# EAGLE board OR, AND, NOT - GATES (EAGLE 9.7.0)

Size 120.42 x 69.28 mm. Coordinates in mm from the lower left corner, seen from the top.
Outline: 0,0 120.42,0 120.42,69.28 0,69.28 0,0
Copper layers (1*16): Top 0.035mm / dielectric 1.5mm / Bottom 0.035mm
Design rules "default": minimum track width 6mil, minimum drill 0.35mm, track to track 6mil, track to pad 6mil, pad to pad 6mil, via to via 6mil, smd to smd 6mil, copper to edge 40mil, drill to drill 6mil, minimum pad ring 10mil, minimum via ring 8mil, stop-mask expansion 4mil, vias tented up to drill 0mil, thermal gap 10mil

## Footprints (pad centres in the part's own frame; a part is rotated, then mirrored left to right if it is on the bottom)
BAT_3002 = smd 3.96 x 3.96: N 0,0.65 | smd 5.08 x 5.08: P 12.825,0.65; P1 -12.825,0.65
LEDRD254W60D565H860B = drill 0.981 pad 1.581: 1 -1.27,0; 2 1.27,0
SWITCH-SPDT-PTH-8.5X3.7MM = drill 1.016 pad 1.88: 1 -2.54,0; 2 0,0; 3 2.54,0
DIP762W53P254L1969H508Q14B = drill 0.743 pad 1.343: 1 -3.81,7.62; 2 -3.81,5.08; 3 -3.81,2.54; 4 -3.81,0; 5 -3.81,-2.54; 6 -3.81,-5.08; 7 -3.81,-7.62; 8 3.81,-7.62; 9 3.81,-5.08; 10 3.81,-2.54; 11 3.81,0; 12 3.81,2.54; 13 3.81,5.08; 14 3.81,7.62

## Placement (x,y rotation side)
BAT2  BR2016  [BAT_3002]  104.99,20.19 90 top
D1  RED  [LEDRD254W60D565H860B]  67,16.95 0 top
SA_-_POWER  TOGGLE  [SWITCH-SPDT-PTH-8.5X3.7MM]  14.28,62.3 0 top
SB_-_POWER  TOGGLE  [SWITCH-SPDT-PTH-8.5X3.7MM]  30.53,57.84 0 top
U1  74HC04_PDIP  [DIP762W53P254L1969H508Q14B]  14.93,23.3 90 top
U2  74HC08_PDIP  [DIP762W53P254L1969H508Q14B]  35.24,23.3 90 top
U3  74HC32_PDIP  [DIP762W53P254L1969H508Q14B]  55.56,23.3 90 top

## Library data of the parts
BAT2 = Tinkercad; CATEGORY: Battery-Holder; CELL_DIAMETER: 20mm; DESCRIPTION: Battery Retainer Coin, 20.0mm 1 Cell SMD (SMT) Tab; MANUFACTURER: Keystone Electronics; MPN: 3002; PART_STATUS: ACTIVE; ROHS_COMPLIANT: COMPLIANT; SERIES: -; SUB_CATEGORY: Holder; TYPE: Coin Cell
D1 = Tinkercad; CATEGORY: Opto-Electronic; SUB-CATEGORY: LED; VALUE: LED_RED
SA_-_POWER SB_-_POWER U1-U3 = Tinkercad

## Nets
BAT2+: BAT2.P BAT2.P1 SA_-_POWER.2 SB_-_POWER.2 U1.14 U2.14 U3.14
BAT2-: BAT2.N D1.2 U1.7 U2.7 U3.7
U1_4A: SB_-_POWER.1 U1.9 U2.12
U1_4Y: U1.8 U3.12
U1_6A: SA_-_POWER.1 U1.13
U1_6Y: U1.12 U2.13
U2_4Y: U2.11 U3.13
U3_4Y: D1.1 U3.11

## Tracks (layer width: path | path; a pad name or v marks a point on that pad's centre or on a via)
BAT2+  (6 unrouted)
BAT2-  (4 unrouted)
U1_4A  (2 unrouted)
U1_4Y  (1 unrouted)
U1_6A  (1 unrouted)
U1_6Y  (1 unrouted)
U2_4Y  (1 unrouted)
U3_4Y  (1 unrouted)